# Altium PCB Via Stitching and Shielding.PcbDoc
Units mil, origin at the board's own origin, x right, y up, seen from the top; angles counter-clockwise.
Board outline 5990 x 2690 mil, 2 copper layers (Top Layer, Bottom Layer); 4 components, 5 nets, 15 pads, 882 vias.
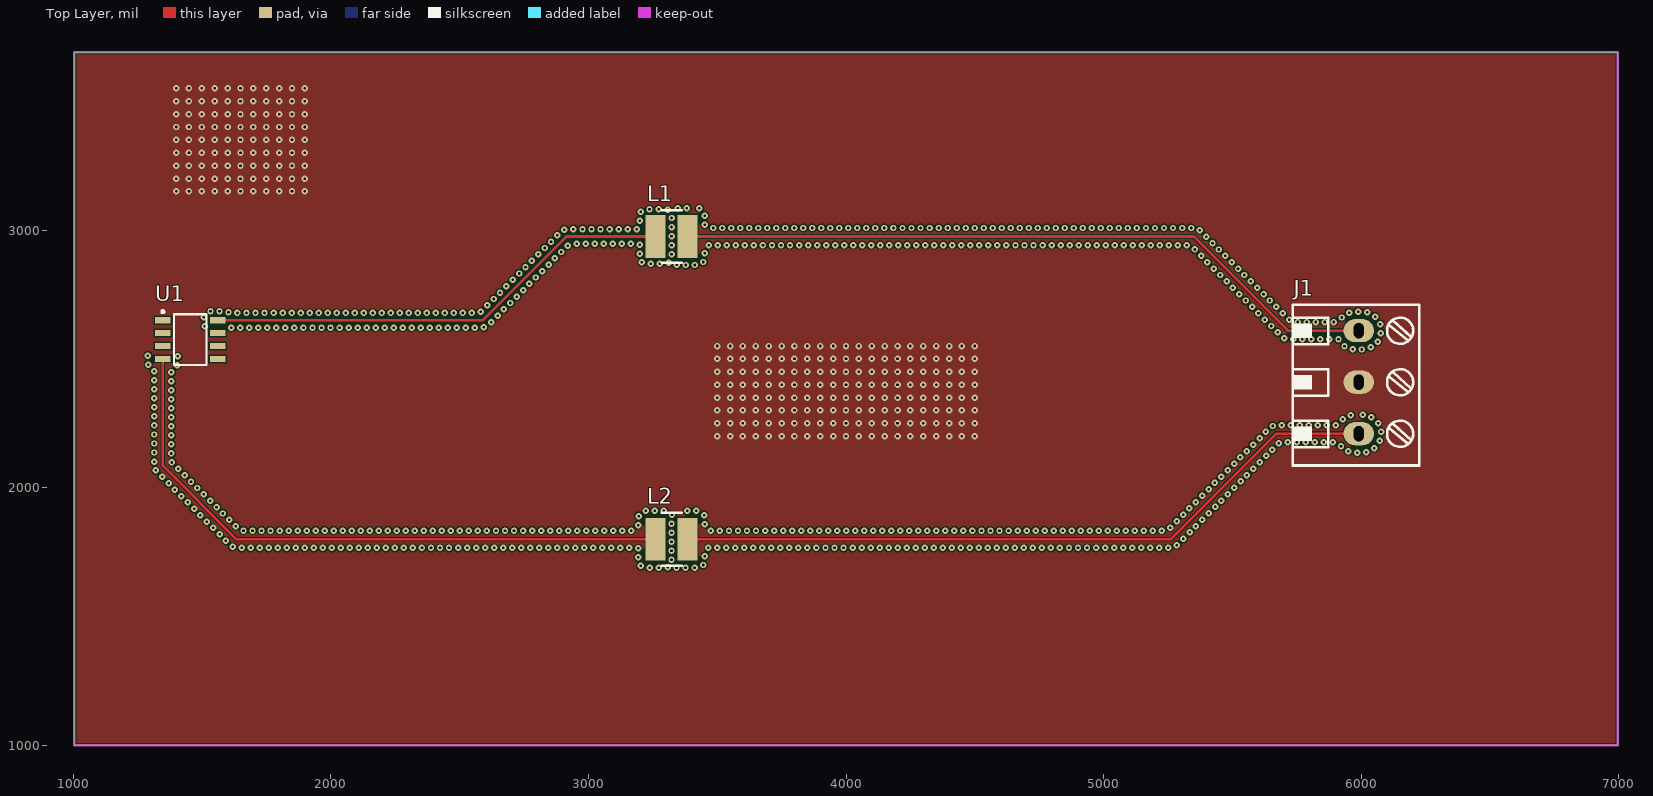
[diagram p0: Top Layer view]
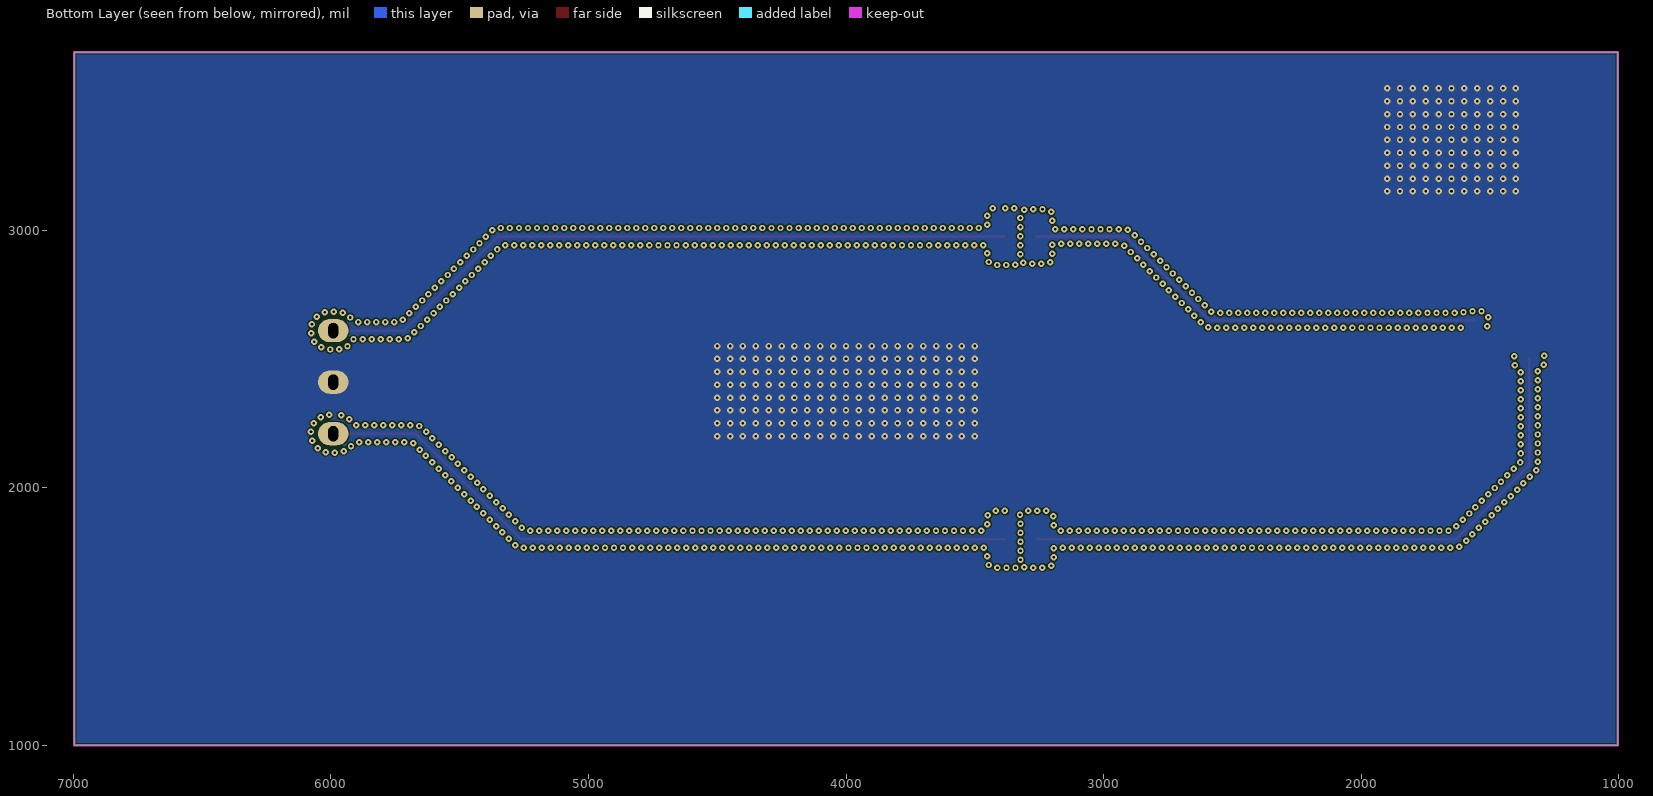
[diagram p1: Bottom Layer view, seen from below]
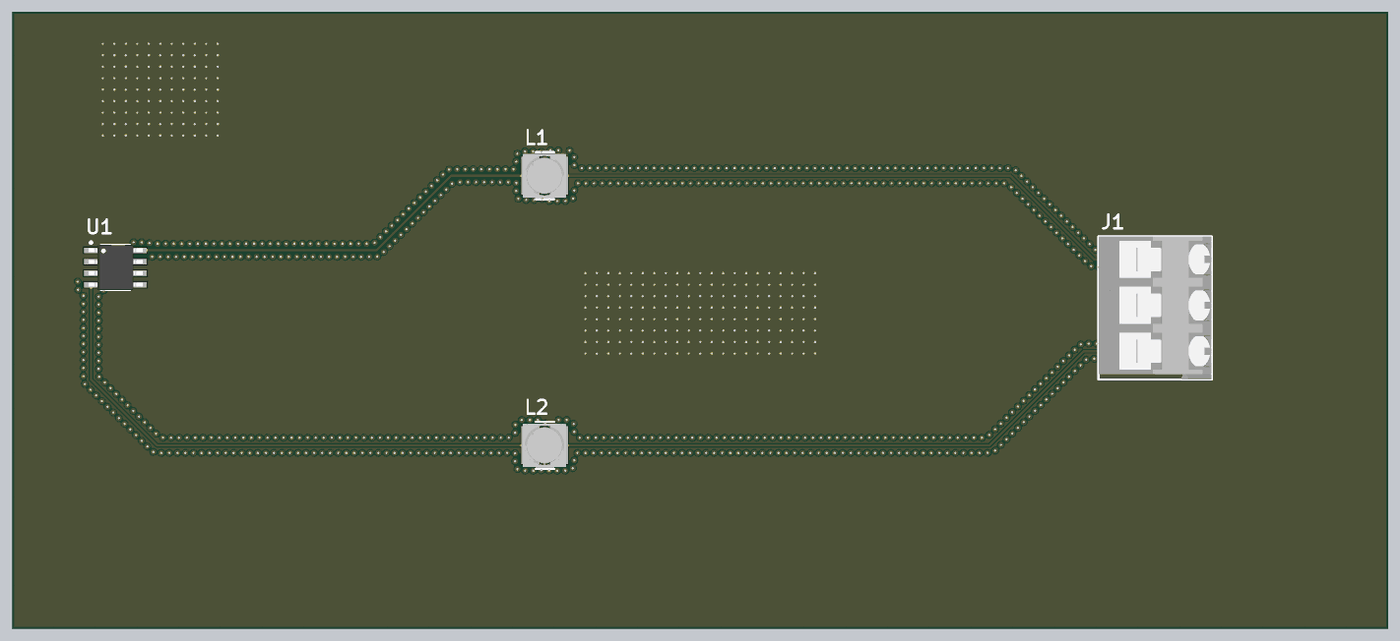
[diagram p2: 3D render of the assembled board from above, using the file's embedded part models]

## Layer stack, top to bottom
Top Solder: solder mask 0.4, Solder Resist, Dk 3.5
Top Layer: signal copper 1.4
Dielectric 1: dielectric 12.6, FR-4, Dk 4.8
Bottom Layer: signal copper 1.4
Bottom Solder: solder mask 0.4, Solder Resist, Dk 3.5

## Board outline
1005,1000 1005,3690 6995,3690 6995,1000

## Design rules (kind name [scope] priority, off if disabled: settings)
Clearance [All] p1: gap=5 ignorepadtopadclearanceinfootprint=FALSE
Clearance "Stitching No Net" [IsStitchingVia and InNet('No Net') vs (IsVia and (Not IsStitchingVia)) Or IsPad] p2: gap=5 ignorepadtopadclearanceinfootprint=FALSE
Clearance "Stitching GND" [IsStitchingVia and InNet('GND') vs (IsVia and (Not IsStitchingVia)) Or IsPad] p3: gap=5 ignorepadtopadclearanceinfootprint=FALSE
PolygonConnect [All] p1: connectstyle=Direct reliefconductorwidth=30 reliefentries=4 polygonreliefangle="90 Angle" airgapwidth=30
RoutingVias [All] p1: holewidth=28 width=50 viastyle="Through Hole" minholewidth=28 minwidth=50 maxholewidth=28 maxwidth=50
SolderMaskExpansion [All] p1: expansion=4
Width [All] p1: maxlimit=10 minlimit=10 preferedwidth=10
30 further rules are at their usual default settings.

## Components (designator, comment, footprint, x,y, rotation, side; value= is the part's Value field where it differs from the comment)
J1 "691201520003" "CLEMA 3X1" 5990,2610 r270 top
L1 "47uH" IND-4.8X4.8mm 3260.98,2975 r0 top
L2 "47uH" IND-4.8X4.8mm 3260.98,1800 r0 top
U1 "ISO1211DR" SOIC8 1455,2575 r0 top

## Footprints (in the part's own frame and the unit in brackets; to place one, negate y for a bottom-side part, rotate by r counter-clockwise, add the part's x,y. Pads: shape width x height; smd on the part's side, far side on the other; paste and mask are expansions set on the pad)
"CLEMA 3X1" [mm] "Wurth Electronics"
  oval 2.3x3 hole 1.5 slot 1 at 90 deg: 1(0,0) 2(5.08,0) 3(10.16,0)
  silkscreen extent -2.54,-6.52 13.3,5.98, body extent -2.54,-6.52 13.3,5.98, height 12.02
IND-4.8X4.8mm [mm] "Inductor SMD 4.8mm x 4.8mm"
  rect 1.98x4.2 smd: 1(0,0) 2(3.15,0)
  silkscreen extent 0.6,-2.6 2.6,2.6, body extent -0.85,-2.4 3.95,2.4, height 2.7
SOIC8 [mm] "SOIC, 8-Leads, Body 4.91x3.90mm, Pitch 1.27mm, IPC Medium Density"
  rect 1.55x0.6 smd: 1(-2.7,1.905) 2(-2.7,0.635) 3(-2.7,-0.635) 4(-2.7,-1.905) 5(2.7,-1.905) 6(2.7,-0.635) 7(2.7,0.635) 8(2.7,1.905)
  silkscreen extent -2.82,-2.5 1.6,2.88, body extent -3,-2.5 3,2.5, height 1.75

## Part data
J1: library part "CLEMA 3X1 Wurth Eectronics", "No. Parte: 691201520003, Pitch 5.08 mm - 45° , Wurth Eectronics", ComponentLink1Description="WR-TBL Serie 2015", ComponentLink1URL=https://www.we-online.com/catalog/en/TBL_5_08_2015_45-DEGREE_ENTRY_W_RISING_CAGE_69120152000x/?sq=691201520002&sp=https%3A%2F%2Fwww.we-online.com%2Fweb%2Fen%2Fwuerth_elektronik%2Fsearchpage.php%3Fsearch%3D691201520002
L1 L2: library part IND-47uH/800mA, "FIXED IND 47UH 0.8A 270 MOHM SMD", Case/Package=Nonstandard, Current Rating=1.2A, DC Resistance (DCR)=270mR, Manufacturer=Bourns, Manufacturer Part Number=SRR4828A-470M, Max Operating Temperature=150°C, Min Operating Temperature=-40°C, Ratings=AEC-Q200, Saturation Current=470mA, Self Resonant Frequency=13MHz, Supplier Part Number 1=652-SRR4828A-470M, Test Frequency=100kHz, Tolerance=20%, ComponentLink1Description=https://www.bourns.com/docs/Product-Datasheets/SRR4828A.pdf?src-supplier=Digi-Key, ComponentLink1URL=https://www.bourns.com/docs/Product-Datasheets/SRR4828A.pdf?src-supplier=Digi-Key, Composition=Wirewound, Core Material=Ferrite, Inductance=47uH, Mount="Surface Mount", Packaging="Cut Tape", Pricing 1="1=0.66, 10=0.588, 25=0.546, 50=0.462, 100=0.42, 250=0.394 (USD)", Shielding=Shielded, Stock 1=791, Supplier 1=Mouser
U1: library part AisladorDig-ISO1211DR, "24-V to 60-V Digital Input Receivers for Digital Input Modules datasheet", Case/Package=SOIC, Manufacturer="Texas Instruments", Max Operating Temperature=125°C, Min Operating Temperature=-55°C, Supplier Part Number 1=296-49651-1-ND, ComponentLink1Description=http://www.ti.com/lit/ds/symlink/iso1211.pdf?src-supplier=Digi-Key, ComponentLink1URL=http://www.ti.com/lit/ds/symlink/iso1211.pdf?src-supplier=Digi-Key, Manufacturer Part Number=ISO1211DR, Mount="Surface Mount", Number of Channels=1, Number of Pins=8, Packaging="Tape and Reel", Precio=$2.03, Pricing 1="1=1.35, 10=1.203, 100=0.9381, 500=0.77498, 1000=0.61182 (USD)", Stock 1=2022, Supplier 1=Digi-Key

## Via types
v1: diameter 25, hole 10, Top Layer to Bottom Layer, tented both sides, 882 vias

## Nets (pads, with @x,y where several pads share a name; then routed paths per layer and width w, separated by ;. In a path a pad name is that pad's centre, name@x,y a point inside that pad or via, vN(x,y) a via of type N, cw(c..) or ccw(c..) an arc to the next point about the centre after c; other vN are vias at no path point)
GND: J1.2
  other v1: 3500,2200 3550,2200 3600,2200 3650,2200 3700,2200 3750,2200 3800,2200 3850,2200 3900,2200 3950,2200 4000,2200 4050,2200 4100,2200 4150,2200 4200,2200 4250,2200 4300,2200 4350,2200 4400,2200 4450,2200 4500,2200 3500,2250 3550,2250 3600,2250 3650,2250 3700,2250 3750,2250 3800,2250 3850,2250 3900,2250 3950,2250 4000,2250 4050,2250 4100,2250 4150,2250 4200,2250 4250,2250 4300,2250 4350,2250 4400,2250 4450,2250 4500,2250 3500,2300 3550,2300 3600,2300 3650,2300 3700,2300 3750,2300 3800,2300 3850,2300 3900,2300 3950,2300 4000,2300 4050,2300 4100,2300 4150,2300 4200,2300 4250,2300 4300,2300 4350,2300 4400,2300 4450,2300 4500,2300 3500,2350 3550,2350 3600,2350 3650,2350 3700,2350 3750,2350 3800,2350 3850,2350 3900,2350 3950,2350 4000,2350 4050,2350 4100,2350 4150,2350 4200,2350 4250,2350 4300,2350 4350,2350 4400,2350 4450,2350 4500,2350 3500,2400 3550,2400 3600,2400 3650,2400 3700,2400 3750,2400 3800,2400 3850,2400 3900,2400 3950,2400 4000,2400 4050,2400 4100,2400 4150,2400 4200,2400 4250,2400 4300,2400 4350,2400 4400,2400 4450,2400 4500,2400 3500,2450 3550,2450 3600,2450 3650,2450 3700,2450 3750,2450 3800,2450 3850,2450 3900,2450 3950,2450 4000,2450 4050,2450 4100,2450 4150,2450 4200,2450 4250,2450 4300,2450 4350,2450 4400,2450 4450,2450 4500,2450 3500,2500 3550,2500 3600,2500 3650,2500 3700,2500 3750,2500 3800,2500 3850,2500 3900,2500 3950,2500 4000,2500 4050,2500 4100,2500 4150,2500 4200,2500 4250,2500 4300,2500 4350,2500 4400,2500 4450,2500 4500,2500 3500,2550 3550,2550 3600,2550 3650,2550 3700,2550 3750,2550 3800,2550 3850,2550 3900,2550 3950,2550 4000,2550 4050,2550 4100,2550 4150,2550 4200,2550 4250,2550 4300,2550 4350,2550 4400,2550 4450,2550 4500,2550 1400,3150 1450,3150 1500,3150 1550,3150 1600,3150 1650,3150 1700,3150 1750,3150 1800,3150 1850,3150 1900,3150 1400,3200 1450,3200 1500,3200 1550,3200 1600,3200 1650,3200 1700,3200 1750,3200 1800,3200 1850,3200 1900,3200 1400,3250 1450,3250 1500,3250 1550,3250 1600,3250 1650,3250 1700,3250 1750,3250 1800,3250 1850,3250 1900,3250 1400,3300 1450,3300 1500,3300 1550,3300 1600,3300 1650,3300 1700,3300 1750,3300 1800,3300 1850,3300 1900,3300 1400,3350 1450,3350 1500,3350 1550,3350 1600,3350 1650,3350 1700,3350 1750,3350 1800,3350 1850,3350 1900,3350 1400,3400 1450,3400 1500,3400 1550,3400 1600,3400 1650,3400 1700,3400 1750,3400 1800,3400 1850,3400 1900,3400 1400,3450 1450,3450 1500,3450 1550,3450 1600,3450 1650,3450 1700,3450 1750,3450 1800,3450 1850,3450 1900,3450 1400,3500 1450,3500 1500,3500 1550,3500 1600,3500 1650,3500 1700,3500 1750,3500 1800,3500 1850,3500 1900,3500 1400,3550 1450,3550 1500,3550 1550,3550 1600,3550 1650,3550 1700,3550 1750,3550 1800,3550 1850,3550 1900,3550
NetJ1_1: J1.1 L1.2 | length 2756.2
  Top Layer w10: L1.2 5350,2975 5715,2610 J1.1
NetJ1_3: J1.3 L2.2 | length 2774.8
  Top Layer w10: L2.2 5260,1800 5670,2210 J1.3
NetL1_1: L1.1 U1.8 | length 1834.3
  Top Layer w10: U1.8 2590,2650 2915,2975 L1.1
NetL2_1: L2.1 U1.4 | length 2444.6
  Top Layer w10: U1.4 1348.7,2086.3 1635,1800 L2.1
pads on no net: U1.1 U1.2 U1.3 U1.5 U1.6 U1.7
copper on no net:
  other v1: 3238.28,1689.59 3273.28,1689.59 3342.14,1690.1 3377.14,1689.59 3412.14,1689.59 3308.25,1690.99 3203.97,1696.5 3445.49,1700.19 3322.7,1720.1 3194.27,1730.13 3451.71,1734.63 3322.7,1755.1 3194.27,1765.13 1654.31,1766.85 1689.31,1766.85 1724.31,1766.85 1759.31,1766.85 1794.31,1766.85 1829.31,1766.85 1864.31,1766.85 1899.31,1766.85 1934.31,1766.85 1969.31,1766.85 2004.31,1766.85 2039.31,1766.85 2074.31,1766.85 2109.31,1766.85 2144.31,1766.85 2179.31,1766.85 2214.31,1766.85 2249.31,1766.85 2284.31,1766.85 2319.31,1766.85 2354.31,1766.85 2389.31,1766.85 2424.31,1766.85 2459.31,1766.85 2494.31,1766.85 2529.31,1766.85 2564.31,1766.85 2599.31,1766.85 2634.31,1766.85 2669.31,1766.85 2704.31,1766.85 2739.31,1766.85 2774.31,1766.85 2809.31,1766.85 2844.31,1766.85 2879.31,1766.85 2914.31,1766.85 2949.31,1766.85 2984.31,1766.85 3019.31,1766.85 3054.31,1766.85 3089.31,1766.85 3124.31,1766.85 3159.31,1766.85 3465.38,1766.85 3500.38,1766.85 3535.38,1766.85 3570.38,1766.85 3605.38,1766.85 3640.38,1766.85 3675.38,1766.85 3710.38,1766.85 3745.38,1766.85 3780.38,1766.85 3815.38,1766.85 3850.38,1766.85 3885.38,1766.85 3920.38,1766.85 3955.38,1766.85 3990.38,1766.85 4025.38,1766.85 4060.38,1766.85 4095.38,1766.85 4130.38,1766.85 4165.38,1766.85 4200.38,1766.85 4235.38,1766.85 4270.38,1766.85 4305.38,1766.85 4340.38,1766.85 4375.38,1766.85 4410.38,1766.85 4445.38,1766.85 4480.38,1766.85 4515.38,1766.85 4550.38,1766.85 4585.38,1766.85 4620.38,1766.85 4655.38,1766.85 4690.38,1766.85 4725.38,1766.85 4760.38,1766.85 4795.38,1766.85 4830.38,1766.85 4865.38,1766.85 4900.38,1766.85 4935.38,1766.85 4970.38,1766.85 5005.38,1766.85 5040.38,1766.85 5075.38,1766.85 5110.38,1766.85 5145.38,1766.85 5180.38,1766.85 5215.38,1766.85 5250.38,1766.85 1619.57,1771.12 5283.88,1777 3322.7,1790.1 1593.57,1794.55 5308.63,1801.75 1568.82,1819.29 3322.7,1825.1 5333.38,1826.5 1661.55,1833.15 1696.55,1833.15 1731.55,1833.15 1766.55,1833.15 1801.55,1833.15 1836.55,1833.15 1871.55,1833.15 1906.55,1833.15 1941.55,1833.15 1976.55,1833.15 2011.55,1833.15 2046.55,1833.15 2081.55,1833.15 2116.55,1833.15 2151.55,1833.15 2186.55,1833.15 2221.55,1833.15 2256.55,1833.15 2291.55,1833.15 2326.55,1833.15 2361.55,1833.15 2396.55,1833.15 2431.55,1833.15 2466.55,1833.15 2501.55,1833.15 2536.55,1833.15 2571.55,1833.15 2606.55,1833.15 2641.55,1833.15 2676.55,1833.15 2711.55,1833.15 2746.55,1833.15 2781.55,1833.15 2816.55,1833.15 2851.55,1833.15 2886.55,1833.15 2921.55,1833.15 2956.55,1833.15 2991.55,1833.15 3026.55,1833.15 3061.55,1833.15 3096.55,1833.15 3131.55,1833.15 3166.55,1833.15 3475.82,1833.15 3510.82,1833.15 3545.82,1833.15 3580.82,1833.15 3615.82,1833.15 3650.82,1833.15 3685.82,1833.15 3720.82,1833.15 3755.82,1833.15 3790.82,1833.15 3825.82,1833.15 3860.82,1833.15 3895.82,1833.15 3930.82,1833.15 3965.82,1833.15 4000.82,1833.15 4035.82,1833.15 4070.82,1833.15 4105.82,1833.15 4140.82,1833.15 4175.82,1833.15 4210.82,1833.15 4245.82,1833.15 4280.82,1833.15 4315.82,1833.15 4350.82,1833.15 4385.82,1833.15 4420.82,1833.15 4455.82,1833.15 4490.82,1833.15 4525.82,1833.15 4560.82,1833.15 4595.82,1833.15 4630.82,1833.15 4665.82,1833.15 4700.82,1833.15 4735.82,1833.15 4770.82,1833.15 4805.82,1833.15 4840.82,1833.15 4875.82,1833.15 4910.82,1833.15 4945.82,1833.15 4980.82,1833.15 5015.82,1833.15 5050.82,1833.15 5085.82,1833.15 5120.82,1833.15 5155.82,1833.15 5190.82,1833.15 5225.82,1833.15 1544.08,1844.04 5258.58,1845.46 1631.23,1850.65 5358.13,1851.25 3194.27,1854.51 3451.71,1858.53 3322.7,1860.1 1519.33,1868.79 5283.33,1870.21 1606.49,1875.39 5382.87,1875.99 3195.17,1889.5 3449.28,1893.44 1494.58,1893.54 3324.64,1894.96 5308.08,1894.96 1581.74,1900.14 5407.62,1900.74 3223.23,1910.41 3258.23,1910.41 3293.23,1910.41 3383.67,1910.41 3418.67,1910.41 1469.83,1918.29 5332.83,1919.71 1556.99,1924.89 5432.37,1925.49 1445.08,1943.04 5357.57,1944.46 1532.24,1949.64 5457.12,1950.24 1420.33,1967.79 5382.32,1969.2 1507.49,1974.39 5481.87,1974.99 1395.58,1992.54 5407.07,1993.95 1482.74,1999.14 5506.62,1999.74 1370.84,2017.28 5431.82,2018.7 1457.99,2023.89 5531.37,2024.49 1346.09,2042.03 5456.57,2043.45 1433.24,2048.64 5556.12,2049.24 1321.86,2067.29 5481.32,2068.2 1408.5,2073.38 5580.86,2073.98 5506.07,2092.95 1383.75,2098.13 5605.61,2098.73 1315.55,2101.72 5530.82,2117.7 5630.36,2123.48 1381.85,2133.08 1315.55,2136.72 5984.61,2136.6 6019.56,2138.48 5555.56,2142.45 5950,2141.83 5655.11,2148.23 6050.87,2154.11 5921.22,2161.74 5580.31,2167.19 1381.85,2168.08 1315.55,2171.72 5679.86,2172.98 5714.64,2176.85 5749.64,2176.85 5784.64,2176.85 5819.64,2176.85 5854.64,2176.85 5889.64,2176.85 6071.4,2182.46 5605.06,2191.94 1381.85,2203.08 1315.55,2206.72 5629.81,2216.69 6076.49,2217.08 1381.85,2238.08 5656.18,2239.71 1315.55,2241.72 5691.01,2243.15 5726.01,2243.15 5761.01,2243.15 5796.01,2243.15 5831.01,2243.15 5866.01,2243.15 5901.01,2243.15 6065.01,2250.15 5928.2,2265.18 1381.85,2273.08 6039.35,2273.95 1315.55,2276.72 5959.31,2281.22 6005.58,2283.17 1381.85,2308.08 1315.55,2311.72 1381.85,2343.08 1315.55,2346.72 1381.85,2378.08 1315.55,2381.72 1381.85,2413.08 1315.55,2416.72 1381.85,2448.08 1315.55,2451.72 1403.69,2475.43 1292.59,2478.13 1406.95,2510.28 1290.62,2513.08 6002.33,2536.6 5967.34,2537.53 6036.42,2544.49 5934.6,2549.91 6063.01,2567.26 5911.33,2576.05 5736.34,2576.85 5771.34,2576.85 5806.34,2576.85 5841.34,2576.85 5876.34,2576.85 5701.5,2580.16 6076.07,2599.73 5675.05,2603.07 1614.39,2621.65 1649.39,2621.65 1684.39,2621.65 1719.39,2621.65 1754.39,2621.65 1789.39,2621.65 1824.39,2621.65 1859.39,2621.65 1894.39,2621.65 1929.39,2621.65 1964.39,2621.65 1999.39,2621.65 2034.39,2621.65 2069.39,2621.65 2104.39,2621.65 2139.39,2621.65 2174.39,2621.65 2209.39,2621.65 2244.39,2621.65 2279.39,2621.65 2314.39,2621.65 2349.39,2621.65 2384.39,2621.65 2419.39,2621.65 2454.39,2621.65 2489.39,2621.65 2524.39,2621.65 2559.39,2621.65 2594.38,2622.52 1511.74,2626.2 5650.3,2627.82 6072.64,2634.56 2622.9,2642.8 5753.24,2643.15 5788.24,2643.15 5823.24,2643.15 5858.24,2643.15 5893.24,2643.15 5719.49,2652.39 5625.55,2652.57 1507.85,2660.98 5923.5,2660.75 6053.43,2663.82 2647.65,2667.55 5600.8,2677.32 5694.74,2677.14 1638.24,2678.35 1673.24,2678.35 1708.24,2678.35 1743.24,2678.35 1778.24,2678.35 1813.24,2678.35 1848.24,2678.35 1883.24,2678.35 1918.24,2678.35 1953.24,2678.35 1988.24,2678.35 2023.24,2678.35 2058.24,2678.35 2093.24,2678.35 2128.24,2678.35 2163.24,2678.35 2198.24,2678.35 2233.24,2678.35 2268.24,2678.35 2303.24,2678.35 2338.24,2678.35 2373.24,2678.35 2408.24,2678.35 2443.24,2678.35 2478.24,2678.35 2513.24,2678.35 2548.24,2678.35 5953.08,2679.44 1603.35,2681.16 6022.75,2680.66 2582.93,2683.02 5987.86,2683.4 1533.54,2684.75 1568.54,2684.75 2672.4,2692.3 5576.05,2702.07 5669.99,2701.89 2607.68,2707.77 2697.15,2717.05 5551.3,2726.82 5645.24,2726.64 2632.42,2732.52 2721.9,2741.8 5620.49,2751.39 5526.55,2751.57 2657.17,2757.27 2746.64,2766.55 5501.81,2776.31 5595.74,2776.14 2681.92,2782.02 2771.39,2791.3 5477.06,2801.06 5570.99,2800.89 2706.67,2806.77 2796.14,2816.05 5452.31,2825.81 5546.24,2825.64 2731.42,2831.52 2820.89,2840.79 5521.5,2850.38 5427.56,2850.56 2756.17,2856.26 3343.22,2864.96 3378.21,2864.59 3413.21,2864.59 2845.64,2865.54 3242.55,2869.38 3277.55,2869.38 3312.3,2873.51 3207.95,2874.66 5402.81,2875.31 5496.75,2875.13 3446.24,2876.17 2780.92,2881.01 2870.39,2890.29 5378.06,2900.06 5472,2899.88 2805.67,2905.76 3322.9,2906.86 3199.07,2908.51 3451.71,2910.74 2895.14,2915.04 5353.31,2924.81 5447.25,2924.63 2830.41,2930.51 2919.89,2939.79 3322.9,2941.86 3467.74,2941.85 3502.74,2941.85 3537.74,2941.85 3572.74,2941.85 3607.74,2941.85 3642.74,2941.85 3677.74,2941.85 3712.74,2941.85 3747.74,2941.85 3782.74,2941.85 3817.74,2941.85 3852.74,2941.85 3887.74,2941.85 3922.74,2941.85 3957.74,2941.85 3992.74,2941.85 4027.74,2941.85 4062.74,2941.85 4097.74,2941.85 4132.74,2941.85 4167.74,2941.85 4202.74,2941.85 4237.74,2941.85 4272.74,2941.85 4307.74,2941.85 4342.74,2941.85 4377.74,2941.85 4412.74,2941.85 4447.74,2941.85 4482.74,2941.85 4517.74,2941.85 4552.74,2941.85 4587.74,2941.85 4622.74,2941.85 4657.74,2941.85 4692.74,2941.85 4727.74,2941.85 4762.74,2941.85 4797.74,2941.85 4832.74,2941.85 4867.74,2941.85 4902.74,2941.85 4937.74,2941.85 4972.74,2941.85 5007.74,2941.85 5042.74,2941.85 5077.74,2941.85 5112.74,2941.85 5147.74,2941.85 5182.74,2941.85 5217.74,2941.85 5252.74,2941.85 5287.74,2941.85 5322.74,2941.85 3199.07,2943.51 2954.21,2946.65 2989.21,2946.65 3024.21,2946.65 3059.21,2946.65 3094.21,2946.65 3129.21,2946.65 3164.21,2946.65 5422.5,2949.38 2855.16,2955.26 5397.75,2974.13 3322.9,2976.86 2879.91,2980.01 5372.95,2998.82 2907.29,3001.82 2942.25,3003.35 2977.25,3003.35 3012.25,3003.35 3047.25,3003.35 3082.25,3003.35 3117.25,3003.35 3152.25,3003.35 3187.25,3003.35 3484.21,3008.15 3519.21,3008.15 3554.21,3008.15 3589.21,3008.15 3624.21,3008.15 3659.21,3008.15 3694.21,3008.15 3729.21,3008.15 3764.21,3008.15 3799.21,3008.15 3834.21,3008.15 3869.21,3008.15 3904.21,3008.15 3939.21,3008.15 3974.21,3008.15 4009.21,3008.15 4044.21,3008.15 4079.21,3008.15 4114.21,3008.15 4149.21,3008.15 4184.21,3008.15 4219.21,3008.15 4254.21,3008.15 4289.21,3008.15 4324.21,3008.15 4359.21,3008.15 4394.21,3008.15 4429.21,3008.15 4464.21,3008.15 4499.21,3008.15 4534.21,3008.15 4569.21,3008.15 4604.21,3008.15 4639.21,3008.15 4674.21,3008.15 4709.21,3008.15 4744.21,3008.15 4779.21,3008.15 4814.21,3008.15 4849.21,3008.15 4884.21,3008.15 4919.21,3008.15 4954.21,3008.15 4989.21,3008.15 5024.21,3008.15 5059.21,3008.15 5094.21,3008.15 5129.21,3008.15 5164.21,3008.15 5199.21,3008.15 5234.21,3008.15 5269.21,3008.15 5304.21,3008.15 5339.21,3008.15 3322.9,3011.86 3451.71,3021.14 3199.07,3036.3 3322.9,3046.86 3451.71,3056.14 3203.83,3070.97 3308.74,3078.87 3237.48,3080.62 3272.48,3080.62 3431.16,3084.47 3347.54,3085.41 3382.54,3085.41

## Polygon pours and split planes (outlines as drawn)
GND on Top Layer (solid, pour order 42): 1005,1000 6995,1000 6995,3690 1005,3690
GND on Bottom Layer (solid, pour order 44): 1005,1000 6995,1000 6995,3690 1005,3690

## Keep-outs
Keep-Out Layer:
  the board outline again, w10